# Altium PCB PCB1.PcbDoc
Units mm, origin at the board's own origin, x right, y up, seen from the top; angles counter-clockwise.
Board outline 129 x 20 mm, 2 copper layers (Top Layer, Bottom Layer); 7 components, 4 nets, 44 pads, 0 vias.
Unrouted connection lines stored in the file: 1.
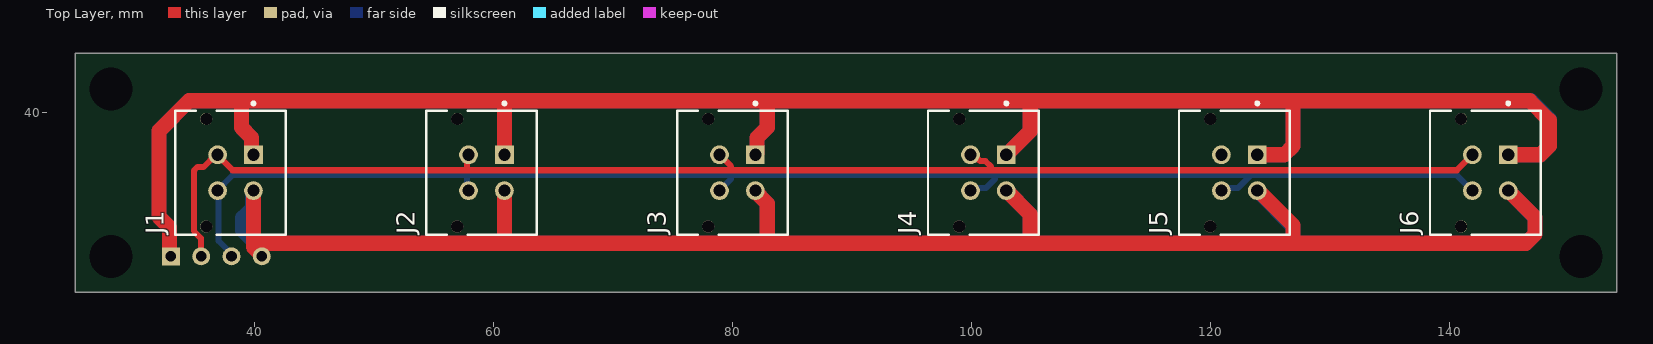
[diagram p0: Top Layer view]
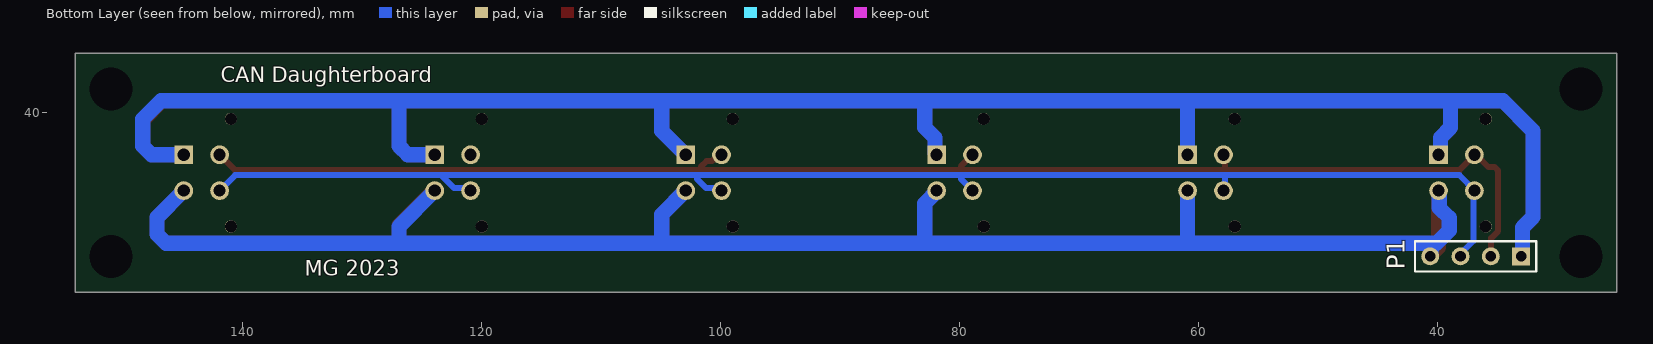
[diagram p1: Bottom Layer view, seen from below]
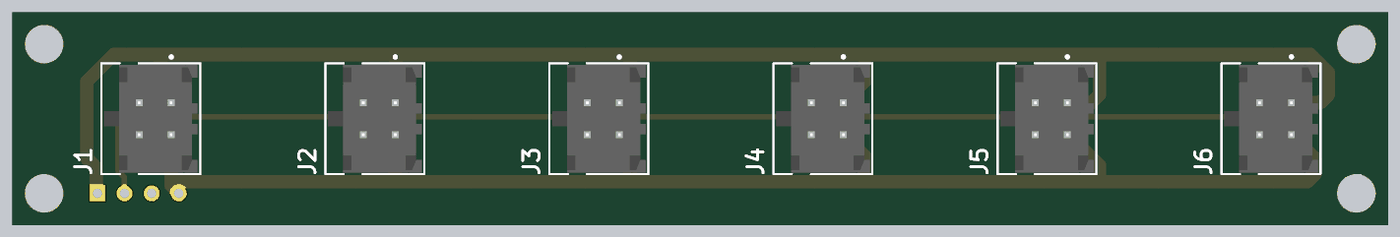
[diagram p2: 3D render of the assembled board from above, using the file's embedded part models]

## Layer stack, top to bottom
Top Solder: solder mask 0.0102, Solder Resist, Dk 3.5
Top Layer: signal copper 0.0356
Dielectric 1: dielectric 0.32, FR-4, Dk 4.8
Bottom Layer: signal copper 0.0356
Bottom Solder: solder mask 0.0102, Solder Resist, Dk 3.5

## Board outline
25,25 25,45 154,45 154,25

## Design rules (kind name [scope] priority, off if disabled: settings)
Clearance [All] p1: gap=0.254 ignorepadtopadclearanceinfootprint=FALSE except(0: Arc-Hole Track-Hole SMDPad-Hole THPad-Hole Via-Hole Fill-Hole Poly-Hole Region-Hole Text-Hole)
PolygonConnect [All] p1: connectstyle=Relief reliefconductorwidth=0.254 reliefentries=4 polygonreliefangle="90 Angle" airgapwidth=0.254
RoutingVias [All] p1: holewidth=0.711 width=1.27 viastyle="Through Hole" minholewidth=0.711 minwidth=1.27 maxholewidth=0.711 maxwidth=1.27
SolderMaskExpansion [All] p1: expansion=0.102 istentingtop=FALSE
Width [All] p1: maxlimit=1.27 minlimit=0.254 preferedwidth=0.254 minimp=50.000000 maximp=50.000000 favimp=50.000000
30 further rules are at their usual default settings.

## Classes and differential pairs
component class Sheet1: J1 J2 J3 J4 J5 J6

## Components (designator, comment, footprint, x,y, rotation, side; value= is the part's Value field where it differs from the comment)
J1 "43045-0427" FP-43045-0427-MFG 38,35 r90 top
J2 "43045-0427" FP-43045-0427-MFG 59,35 r90 top
J3 "43045-0427" FP-43045-0427-MFG 80,35 r90 top
J4 "43045-0427" FP-43045-0427-MFG 101,35 r90 top
J5 "43045-0427" FP-43045-0427-MFG 122,35 r90 top
J6 "43045-0427" FP-43045-0427-MFG 143,35 r90 top
P1 "Header 4" HDR1X4 33,28 r0 bottom

## Footprints (in the part's own frame and the unit in brackets; to place one, negate y for a bottom-side part, rotate by r counter-clockwise, add the part's x,y. Pads: shape width x height; smd on the part's side, far side on the other; paste and mask are expansions set on the pad)
FP-43045-0427-MFG [mm]
  rect 1.57x1.57 hole 1.02 paste-2539.97 mask+0: 1(1.5,-1.915)
  round 1.57 hole 1.02 paste-2539.97 mask+0: 2(-1.5,-1.915) 3(1.5,1.085) 4(-1.5,1.085)
  round 1.02 hole 1.02 unplated paste-2539.97 mask+0: ""(-4.5,2.025) ""(4.5,2.025)
  silkscreen extent -5.2,-4.63 5.92,4.63, body extent -5.3,-4.73 5.3,4.73, height 0.25
HDR1X4 [mm] "Connector; Header; 4 Position"
  rect 1.5x1.5 hole 0.9: 1(0,0)
  round 1.5 hole 0.9: 2(2.54,0) 3(5.08,0) 4(7.62,0)
  silkscreen extent -1.27,-1.27 8.89,1.27

## Part data
J1 J2 J3 J4 J5 J6: library part CMP-04776-000336-1, "CONN HEADER VERT 4POS 3MM", Contact Resistance=10mR, Current Rating=5A, Max Operating Temperature=105°C, Max Voltage Rating (DC)=250.25kV, Min Operating Temperature=-40°C, Package Quantity=2232, Voltage Rating=600V, Contact Material=Brass, Contact Plating=Tin, Glow Wire Compliant=Compliant, Halogen Free="Low Halogen", Housing Material=Thermoplastic, Mount="Through Hole", Number of Circuits=4, Number of Contacts=4, Number of Positions=4, Number of Rows=2, Orientation=Vertical, Packaging=Tray, Pitch=3mm, Radiation Hardening=No, REACH SVHC="No SVHC", Row Spacing=3mm, Series=43045, Termination=Solder
P1: "Header, 4-Pin", LatestRevisionDate=17-Jul-2002, LatestRevisionNote="Re-released for DXP Platform.", Publisher="Altium Limited"

## Free pads (board coordinates)
  round 0 hole 3.6 paste-2539.97: 13(28,28) 13(28,42) 13(151,28) 13(151,42)

## Nets (pads, with @x,y where several pads share a name; then routed paths per layer and width w, separated by ;. In a path a pad name is that pad's centre, name@x,y a point inside that pad or via, vN(x,y) a via of type N, cw(c..) or ccw(c..) an arc to the next point about the centre after c; other vN are vias at no path point)
+5: J1.1 J2.1 J3.1 J4.1 J5.1 J6.1 P1.1 | length 323.8
  Top Layer w1.27: P1.1 32.885,28.115 32.885,30.405 32,31.29 32,38.503 34.518,41.021 39.116,41.021 ; J1.1 39.765,36.65 39.765,37.92 38.915,38.77 38.915,40.82 39.116,41.021 ; J2.1 60.915,40.849 61.087,41.021 ; J3.1 82.065,36.65 82.065,37.92 82.915,38.77 82.915,41.005 82.931,41.021 ; J4.1 104.915,38.5 104.915,40.907 105.029,41.021 ; J5.1 126.171,36.5 126.915,37.244 126.915,40.725 126.619,41.021 ; J6.1 147.605,36.5 148.349,37.244 148.349,39.384 146.712,41.021 126.619,41.021 ; 39.116,41.021 61.087,41.021 ; 61.087,41.021 82.931,41.021 ; 82.931,41.021 105.029,41.021 ; 105.029,41.021 126.619,41.021
  Bottom Layer w1.27: P1.1 32.885,28.115 32.885,30.405 32,31.29 32,38.503 34.518,41.021 38.915,41.021 60.96,41.021 ; 38.915,40.968 38.915,38.77 39.765,37.92 39.765,36.65 J1.1 ; J2.1 60.915,40.976 60.96,41.021 ; J3.1 82.065,36.65 82.065,37.92 82.915,38.77 82.915,40.91 82.804,41.021 ; J4.1 104.915,38.5 104.915,41.008 104.902,41.021 ; J5.1 126.171,36.5 126.915,37.244 126.915,40.936 127,41.021 ; J6.1 147.605,36.5 148.349,37.244 148.349,39.487 146.815,41.021 127,41.021 ; 60.96,41.021 82.804,41.021 ; 82.804,41.021 104.902,41.021 ; 104.902,41.021 127,41.021
CAN_H: J1.3 J2.3 J3.3 J4.3 J5.3 J6.3 P1.2 | length 121.6
  Top Layer w0.508: P1.2 35.523,28.017 35.523,29.512 34.925,30.11 34.925,35.179 35.223,35.476 35.751,35.476 36.775,36.5 J1.3 36.915,36.461 38.169,35.207 57.785,35.207 ; J2.3 57.785,36.37 57.785,35.207 ; J3.3 78.915,36.491 79.883,35.523 79.883,35.207 ; J4.3 100.202,36.5 100.733,35.969 101.176,35.969 101.622,35.523 101.622,35.312 101.727,35.207 ; J6.3 140.622,35.207 123.825,35.207 101.727,35.207 ; 57.785,35.207 79.883,35.207 ; 79.883,35.207 101.727,35.207
CAN_L: J1.4 J2.4 J3.4 J4.4 J5.4 J6.4 P1.3 | length 120.9
  Bottom Layer w0.508: P1.3 38.08,28.215 36.993,29.302 36.993,33.471 36.915,33.549 38.164,34.798 57.785,34.798 ; J2.4 57.785,33.63 57.785,34.798 ; J3.4 78.915,33.514 79.883,34.482 79.883,34.798 ; J4.4 100.118,33.703 101.202,33.703 101.981,34.482 101.981,34.798 ; J5.4 121.118,33.703 122.29,33.703 123.384,34.798 140.617,34.798 J6.4 ; 123.379,34.798 101.981,34.798 ; 57.785,34.798 79.883,34.798 ; 79.883,34.798 101.981,34.798
GND: J1.2 J2.2 J3.2 J4.2 J5.2 J6.2 P1.4 | length 276.1
  Top Layer w1.27: J1.2 39.915,28.767 40.62,28.062 P1.4 ; 40.783,29.101 60.96,29.101 ; J2.2 60.915,29.146 60.96,29.101 ; J3.2 81.915,33.419 82.915,32.419 82.915,29.244 83.058,29.101 ; J4.2 104.915,31.5 104.915,29.114 104.902,29.101 ; J5.2 123.996,33.5 125.85,31.647 125.869,31.647 126.915,30.601 126.915,29.397 126.619,29.101 ; J6.2 147.144,31.271 147.144,29.845 146.4,29.101 126.619,29.101 ; 60.96,29.101 83.058,29.101 ; 83.058,29.101 104.902,29.101 ; 104.902,29.101 126.619,29.101
  Bottom Layer w1.27: J1.2 39.858,33.443 39.858,32.06 39.025,31.227 39.025,30.175 40.099,29.101 40.783,29.101 ; P1.4 40.576,28.044 40.576,28.624 40.441,28.759 40.783,29.101 ; J2.2 60.915,29.146 60.96,29.101 ; J3.2 81.915,33.419 82.915,32.419 82.915,29.244 83.058,29.101 ; J4.2 104.915,31.5 104.915,29.215 105.029,29.101 ; J5.2 126.915,30.5 126.915,29.186 127,29.101 ; J6.2 147.149,31.266 147.149,29.845 146.405,29.101 127,29.101 ; 40.783,29.101 60.96,29.101 ; 60.96,29.101 83.058,29.101 ; 83.058,29.101 105.029,29.101 ; 105.029,29.101 127,29.101
pads on no net: J1. J2. J3. J4. J5. J6.

## Silkscreen, mask and mechanical layers (free items; w line width, h text height)
Bottom Overlay:
  text "CAN Daughterboard" at 141.8,42.577 h1.27
  text "MG 2023" at 134.8,26.365 h1.27
Mechanical 1:
  the board outline again, w0.2